# Altium PCB new_controller.PcbDoc
Units mil, origin at the board's own origin, x right, y up, seen from the top; angles counter-clockwise.
Board outline 6000 x 4000 mil, 2 copper layers (Top Layer, Bottom Layer); 61 components, 46 nets, 228 pads, 0 vias.
Unrouted connection lines stored in the file: 145.
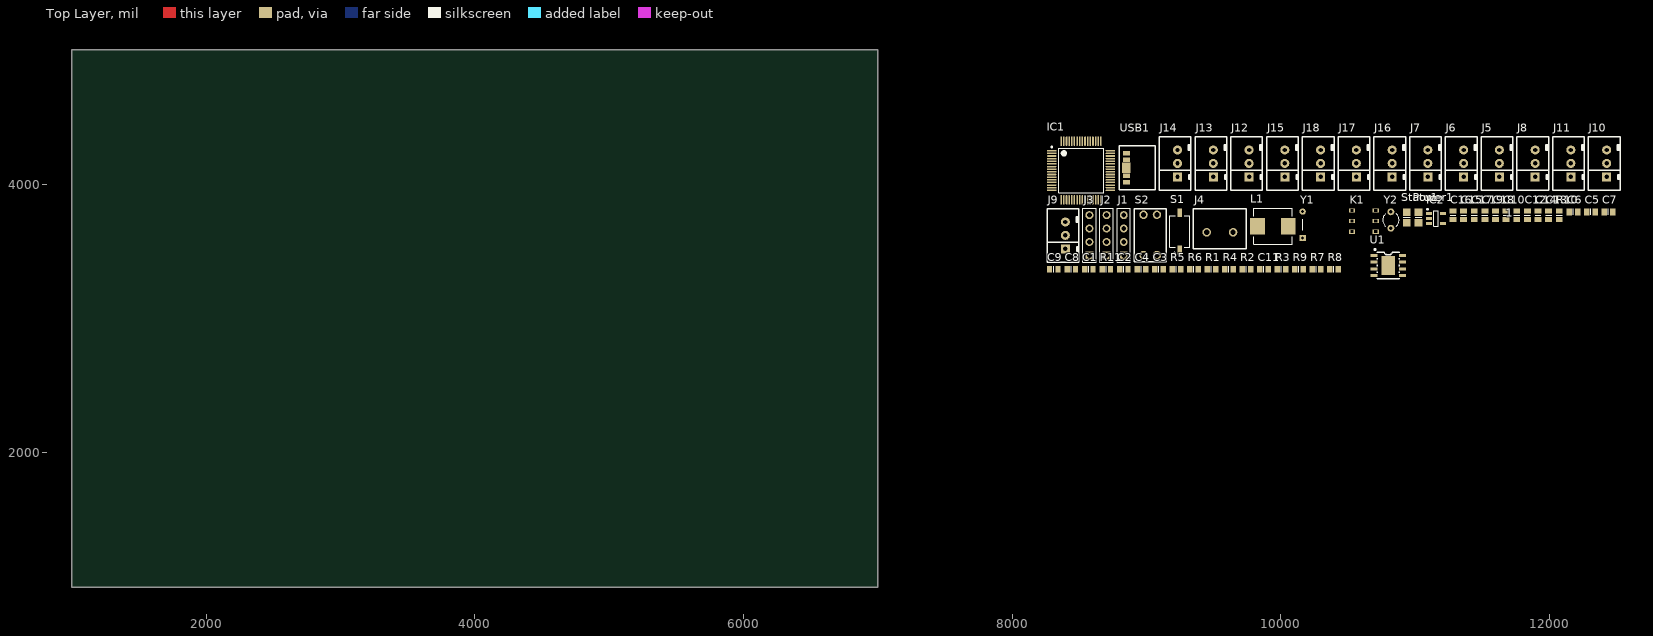
[diagram p0: Top Layer view]
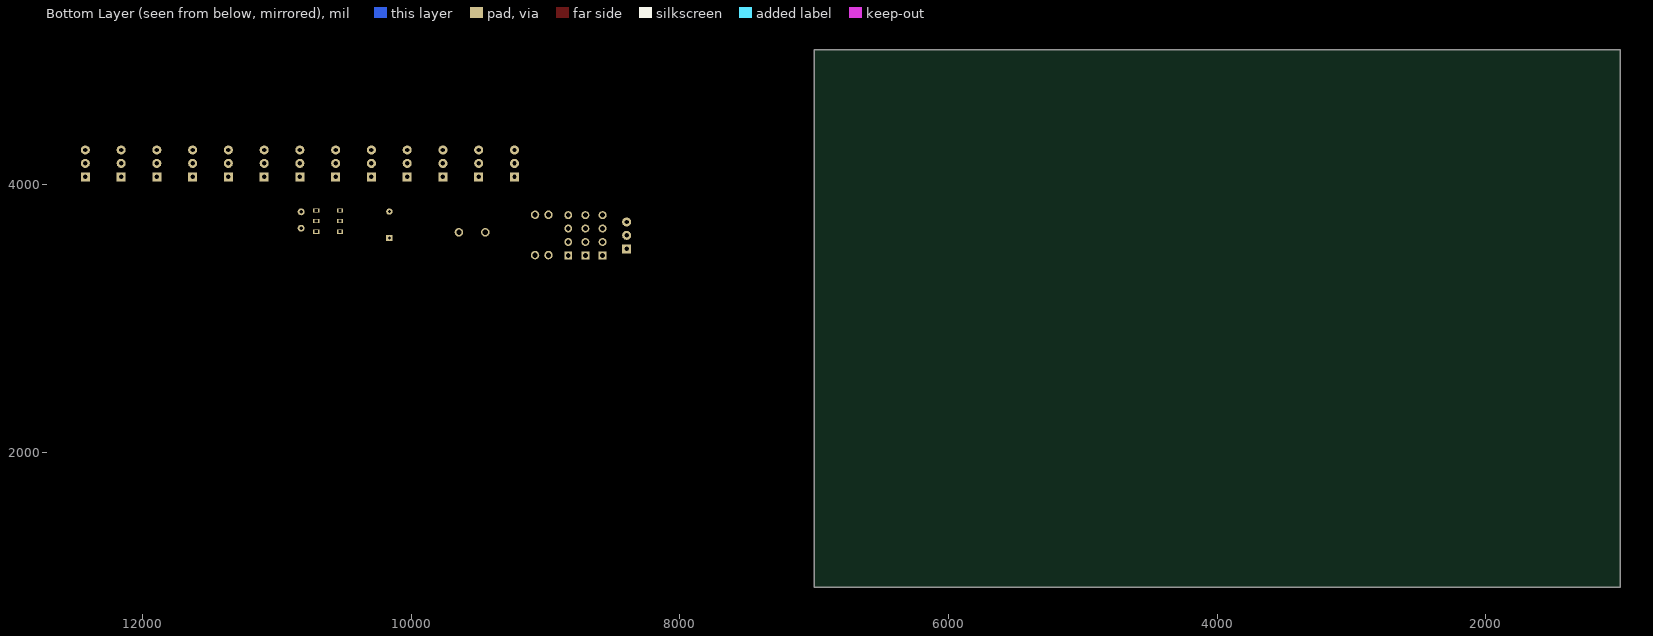
[diagram p1: Bottom Layer view, seen from below]

## Layer stack, top to bottom
Top Solder: solder mask 0.4, Solder Resist, Dk 3.5
Top Layer: signal copper 1.4
Dielectric 1: dielectric 12.6, FR-4, Dk 4.8
Bottom Layer: signal copper 1.4
Bottom Solder: solder mask 0.4, Solder Resist, Dk 3.5

## Board outline
1000,1000 7000,1000 7000,5000 1000,5000

## Design rules (kind name [scope] priority, off if disabled: settings)
Clearance [All] p1: gap=10 ignorepadtopadclearanceinfootprint=FALSE except(0: Arc-Hole Track-Hole SMDPad-SMDPad SMDPad-Hole THPad-Hole Via-Hole Fill-Hole Poly-Hole Region-Hole Text-Hole)
PolygonConnect [All] p1: connectstyle=Relief reliefconductorwidth=10 reliefentries=4 polygonreliefangle="90 Angle" airgapwidth=10
RoutingVias [All] p1: holewidth=28 width=50 viastyle="Through Hole" minholewidth=28 minwidth=50 maxholewidth=28 maxwidth=50
SolderMaskExpansion [All] p1: expansion=4
Width [All] p1: maxlimit=10 minlimit=10 preferedwidth=10
30 further rules are at their usual default settings.

## Components (designator, comment, footprint, x,y, rotation, side; value= is the part's Value field where it differs from the comment)
1 "LED" 6-0805_L 11756.7,3768.95 r90 top
C1 "0.1uf" 6-0805_L 8570.91,3366.66 r0 top
C2 "1uf" 6-0805_L 8831.63,3366.66 r0 top
C3 "22pF" 6-0805_L 9092.35,3366.66 r0 top
C4 "22pF" 6-0805_L 8961.99,3366.66 r0 top
C5 "0.1uf" 6-0805_L 12308.56,3794.54 r0 top
C6 "22pF" 6-0805_L 12178.2,3794.54 r0 top
C7 "22pF" 6-0805_L 12438.92,3794.54 r0 top
C8 "10uf" 6-0805_L 8440.54,3366.66 r0 top
C9 "0.1uf" 6-0805_L 8310.18,3366.66 r0 top
C10 "10uf" 6-0805_L 11677.52,3768.95 r90 top
C11 "22uf" 6-0805_L 9874.53,3366.66 r0 top
C12 "22uf" 6-0805_L 11835.88,3768.95 r90 top
C13 "22uf" 6-0805_L 11994.24,3768.95 r90 top
C14 "22uf" 6-0805_L 11915.06,3768.95 r90 top
C15 "0.1uf" 6-0805_L 11360.79,3768.95 r90 top
C16 "22uf" 6-0805_L 11281.61,3768.95 r90 top
C17 "470pF" 6-0805_L 11439.98,3768.95 r90 top
C18 "22uf" 6-0805_L 11598.34,3768.95 r90 top
C19 "2.2uF" 6-0805_L 11519.16,3768.95 r90 top
IC1 "STM32F103RBT6" LQFP64_N 8512.94,4102.06 r0 top
IC2 "MIC5205-3.3" SOT-23-5 11155.19,3745.39 r0 top
J1 "CON4" HDR1X4 8830.91,3470.19 r90 top
J2 "蓝牙" HDR1X4 8703.03,3470.19 r90 top
J3 "MPU6050" HDR1X4 8575.16,3470.19 r90 top
J4 "BAT" 接线座2P 9546.46,3641.96 r0 top
J5 "CON3" XH2.54-3P 11627.25,4055 r90 top
J6 "CON3" XH2.54-3P 11361.03,4055 r90 top
J7 "CON3" XH2.54-3P 11094.81,4055 r90 top
J8 "CON3" XH2.54-3P 11893.47,4055 r90 top
J9 "CON3" XH2.54-3P 8396.22,3519.13 r90 top
J10 "CON3" XH2.54-3P 12425.91,4055 r90 top
J11 "CON3" XH2.54-3P 12159.69,4055 r90 top
J12 "CON3" XH2.54-3P 9763.71,4055 r90 top
J13 "CON3" XH2.54-3P 9497.49,4055 r90 top
J14 "CON3" XH2.54-3P 9231.27,4055 r90 top
J15 "CON3" XH2.54-3P 10029.93,4055 r90 top
J16 "CON3" XH2.54-3P 10828.59,4055 r90 top
J17 "CON3" XH2.54-3P 10562.37,4055 r90 top
J18 "CON3" XH2.54-3P 10296.15,4055 r90 top
K1 "BUTTON" switch 10529.53,3804.38 r0 top
L1 "1UH" 0630电感 9941.6,3686.33 r0 top
Power1 "LED_Red" 6-0805_M 11024.83,3753.2 r90 top
R1 "10M" 6-0805_L 9483.44,3366.66 r0 top
R2 "2R" 6-0805_L 9744.16,3366.66 r0 top
R3 "10K" 6-0805_L 10004.89,3366.66 r0 top
R4 "10K" 6-0805_L 9613.8,3366.66 r0 top
R5 "1K" 6-0805_L 9222.72,3366.66 r0 top
R6 "10K" 6-0805_L 9353.08,3366.66 r0 top
R7 "0.5R" 6-0805_L 10265.61,3366.66 r0 top
R8 "1K" 6-0805_L 10395.97,3366.66 r0 top
R9 "1K" 6-0805_L 10135.25,3366.66 r0 top
R10 "10K" 6-0805_L 12073.42,3768.95 r90 top
R11 "10K" 6-0805_L 8701.27,3366.66 r0 top
S1 "KEY_2P" button 9247.83,3648.87 r90 top
S2 "DIP2" DIP2 9027.95,3622.28 r0 top
Statu1 "LED_Blue" 6-0805_M 10937.77,3753.2 r90 top
U1 "IP5306" ESOP8 10662.88,3469.61 r0 top
USB1 "USB" Type-C 8850.87,4122.93 r90 top
Y1 "XTAL_8M" xtal 10162.51,3599.65 r90 top
Y2 "XTAL_32.768K" R38 10819.28,3733.51 r0 top

## Footprints (in the part's own frame and the unit in brackets; to place one, negate y for a bottom-side part, rotate by r counter-clockwise, add the part's x,y. Pads: shape width x height; smd on the part's side, far side on the other; paste and mask are expansions set on the pad)
6-0805_L [mm] "Chip Resistor, Body 2.0x1.2mm, IPC High Density"
  rect 1x1.3 smd: 1(-0.8,0) 2(0.8,0)
  silkscreen extent 0,-0.55 0,0.55, body extent -1.07,-0.7 1.07,0.7, height 0.7
6-0805_M [mm] "Chip Resistor, Body 2.0x1.2mm, IPC Low Density"
  rect 1.4x1.5 smd: 1(-1,0) 2(1,0)
  silkscreen extent 0,-0.65 0,0.65, body extent -1.07,-0.7 1.07,0.7, height 0.7
0630电感 [mm] "Precision Wire Wound Inductor, 2-Leads, Body 7.30x6.60mm, IPC Medium Density"
  rect 2.75x3.1 smd: 1(-2.925,0) 2(2.925,0)
  silkscreen extent -3.65,-3.4 3.65,3.4, body extent -3.65,-3.4 3.65,3.4, height 3
button [mm] "SODFL, 2-Leads, Body 3.70x8.00mm, IPC Medium Density"
  rect 1.65x0.85 smd: 1(-3.525,0) 2(3.525,0)
  silkscreen extent -4.22,-1.85 3,1.85, body extent -3,-1.85 3,1.85, height 2.5
DIP2 [mm]
  round 1.6 hole 1: ""(-1.27,-3.81) ""(-1.27,3.81) ""(1.27,-3.81) ""(1.27,3.81)
  silkscreen extent -3,-5.1 3,5
ESOP8 [mm]
  rect 1.3x0.6 smd: 1(0.783,0.01) 2(0.783,-1.26) 3(0.783,-2.53) 4(0.783,-3.8) 5(6.183,-3.8) 6(6.183,-2.53) 7(6.183,-1.26) 8(6.183,0.01)
  rect 2.5x3.5 smd: 9(3.483,-1.895)
  silkscreen extent 0.81,-4.44 5.53,1.3
HDR1X4 [mm] "Connector; Header; 4 Position"
  rect 1.5x1.5 hole 0.9: 1(0,0)
  round 1.5 hole 0.9: 2(2.54,0) 3(5.08,0) 4(7.62,0)
  silkscreen extent -1.27,-1.27 8.89,1.27, body extent -1.27,-1.27 8.89,1.27, height 8.38
LQFP64_N [mm] "Thin QFP, 64-Leads, Body 10x10mm, Pitch 0.5mm, IPC Medium Density"
  oval 1.8x0.3 smd: 1(-5.55,3.75) 2(-5.55,3.25) 3(-5.55,2.75) 4(-5.55,2.25) 5(-5.55,1.75) 6(-5.55,1.25) 7(-5.55,0.75) 8(-5.55,0.25) 9(-5.55,-0.25) 10(-5.55,-0.75) 11(-5.55,-1.25) 12(-5.55,-1.75) 13(-5.55,-2.25) 14(-5.55,-2.75) 15(-5.55,-3.25) 16(-5.55,-3.75) 33(5.55,-3.75) 34(5.55,-3.25) 35(5.55,-2.75) 36(5.55,-2.25) 37(5.55,-1.75) 38(5.55,-1.25) 39(5.55,-0.75) 40(5.55,-0.25) 41(5.55,0.25) 42(5.55,0.75) 43(5.55,1.25) 44(5.55,1.75) 45(5.55,2.25) 46(5.55,2.75) 47(5.55,3.25) 48(5.55,3.75)
  oval 0.3x1.8 smd: 17(-3.75,-5.55) 18(-3.25,-5.55) 19(-2.75,-5.55) 20(-2.25,-5.55) 21(-1.75,-5.55) 22(-1.25,-5.55) 23(-0.75,-5.55) 24(-0.25,-5.55) 25(0.25,-5.55) 26(0.75,-5.55) 27(1.25,-5.55) 28(1.75,-5.55) 29(2.25,-5.55) 30(2.75,-5.55) 31(3.25,-5.55) 32(3.75,-5.55) 49(3.75,5.55) 50(3.25,5.55) 51(2.75,5.55) 52(2.25,5.55) 53(1.75,5.55) 54(1.25,5.55) 55(0.75,5.55) 56(0.25,5.55) 57(-0.25,5.55) 58(-0.75,5.55) 59(-1.25,5.55) 60(-1.75,5.55) 61(-2.25,5.55) 62(-2.75,5.55) 63(-3.25,5.55) 64(-3.75,5.55)
  silkscreen extent -5.67,-4.25 4.25,4.57, body extent -5,-5 5,5, height 1.6
R38 [mm] "Crystal, Thru-Hole; 2 Leads; Body 3.1 x 8.2 mm (Dia.xH)"
  round 1.3 hole 0.7: 1(0,1.55) 2(0,-1.55)
  silkscreen extent -1.55,-1.19 1.55,1.17
SOT-23-5 [mm]
  rect 1.1x0.6 smd: 1(-1.3,0.95) 2(-1.3,0) 3(-1.3,-0.95) 4(1.3,-0.95) 5(1.3,0.95)
  silkscreen extent -1.72,-1.45 0.43,1.87, body extent -1.37,-1.45 1.43,1.45, height 1.45
switch [mm]
  rect 1.2x0.8 hole 0.5 square: 1(0,0) 2(0,-2) 3(0,-4) 4(4.5,-4) 5(4.5,-2) 6(4.5,0)
Type-C [mm] "贴片母头"
  rect 0.8x1.4 smd: 1(-2.75,0) 1(2.75,0) 2(-1.52,0) 2(1.52,0) ""(-0.5,0) ""(0.5,0)
  rect 1.95x1.2 smd: ""(0,0) ""(0,0)
  rect 1.95x1.6 smd: ""(0,0) ""(0,0)
  silkscreen extent -4.17,-5.44 4.17,1.4
XH2.54-3P [mm]
  rect 1.7x1.7 hole 0.83: 1(0,0)
  round 1.7 hole 0.83: 2(2.54,0) 3(5.08,0)
  silkscreen extent -2.54,-2.54 7.62,3.46, body extent -2.41,-2.35 7.49,3.4, height 7
xtal [mm]
  rect 1.2x1.2 hole 0.6: 1(0,0)
  round 1.2 hole 0.6: 2(5,0)
  silkscreen extent 1.43,0 3.57,0
接线座2P [mm]
  round 1.6 hole 1: 1(-2.5,0) 2(2.5,0)
  silkscreen extent -5,-3.1 5,4.5

## Part data
C1 C2 C3 C4 C5 C6 C7 C9 C15 C17 C19: library part "Cap Semi", "Capacitor (Semiconductor SIM Model)"
C8 C10 C11 C12 C13 C14 C16 C18: library part CAP, "电容"
IC1: "STM32 ARM-based 32-bit MCU with 128 Kbytes Flash, 64-pin LQFP, Industrial Temperature"
IC2: "稳压"
J1 J5 J6 J7 J8 J9 J10 J11 J12 J13 J14 J15 J16 J17 J18: "连接器"
J2 J3: library part CON4, "Connector"
J4: library part CON2, "连接器"
K1: "自锁按键"
L1: library part Inductor, "电感"
Power1 Statu1: library part LED, "LED"
R1 R3 R4 R5 R6 R8 R10 R11: library part Res3, "Resistor"
R2 R7 R9: library part RES, "电阻"
S1: "轻触按键2P"
S2: library part 拨码开关2DIP
USB1: library part CON2, "Conjunctor"
Y1 Y2: library part XTAL, "Crystal Oscillator"

## Nets (pads, with @x,y where several pads share a name; then routed paths per layer and width w, separated by ;. In a path a pad name is that pad's centre, name@x,y a point inside that pad or via, vN(x,y) a via of type N, cw(c..) or ccw(c..) an arc to the next point about the centre after c; other vN are vias at no path point)
+5: IC2.1 IC2.3 J2.1 J5.1 J6.1 J7.1 J8.1 J9.1 J10.1 J11.1 J12.1 J13.1 J14.1 J15.1 J16.1 J17.1 J18.1 K1.2 K1.5
ADC0: IC1.14 J5.2
ADC1: IC1.15 J6.2
ADC2: IC1.16 J7.2
ADC3: IC1.17 J8.2
ADC4: IC1.20 J9.2
ADC5: IC1.21 J10.2
ADC6: IC1.22 J11.2
ADC7: IC1.23 J12.2
ADC8: IC1.26 J13.2
ADC9: IC1.27 J14.2
ADC10: IC1.8 J15.2
ADC11: IC1.9 J16.2
ADC12: IC1.10 J17.2
ADC13: IC1.11 J18.2
BOOT0: IC1.60 R3.2
BOOT1: IC1.28 R4.1
Function_1: IC1.41
Function_2: IC1.42
GND: 1.2 C1.1 C2.1 C3.1 C4.1 C5.1 C6.1 C7.1 C8.2 C9.1 C10.2 C11.2 C12.2 C13.2 C14.2 C15.1 C16.2 C17.1 C18.2 C19.1 IC1.12 IC1.18 IC1.31 IC1.47 IC1.63 IC2.2 J1.1 J2.2 J3.3 J4.2 J5.3 J6.3 J7.3 J8.3 J9.3 J10.3 J11.3 J12.3 J13.3 J14.3 J15.3 J16.3 J17.3 J18.3 R3.1 R4.2 R5.1 S1.2 U1.9 USB1.2
Net1_A: 1.1 U1.2
NetC8_1: C8.1 R2.1
NetC10_1: C10.1 R2.2 U1.1 USB1.1
NetC11_1: C11.1 C12.1 C13.1 C14.1 K1.3 U1.8
NetC16_1: C16.1 R7.2 U1.6
NetC17_2: C17.2 IC2.4
NetC18_1: C18.1 J4.1 L1.2 R7.1 R9.1
NetIC1_46: IC1.46 J1.3
NetIC1_49: IC1.49 J1.2
NetL1_1: L1.1 U1.7
NetPower1_2: Power1.2 R5.2
NetR8_2: R8.2 Statu1.2
NetR9_2: R9.2 U1.3 U1.4
NetR10_1: R10.1
NetR11_1: R11.1
NRST: C15.2 IC1.7 R6.1 S1.1
PB12: IC1.33 R8.1
RXD1: IC1.29 J2.4
SCL: IC1.58 J3.2
SDA: IC1.59 J3.1
TXD1: IC1.30 J2.3
VCC3.3: C1.2 C2.2 C5.2 C9.2 C19.2 IC1.1 IC1.13 IC1.19 IC1.32 IC1.48 IC1.64 IC2.5 J1.4 J3.4 Power1.1 R6.2 R10.2 R11.2 Statu1.1
XTAL_A: C3.2 IC1.5 R1.1 Y1.1
XTAL_B: C6.2 IC1.6 R1.2 Y1.2
XTAL_C: C4.2 IC1.3 Y2.1
XTAL_D: C7.2 IC1.4 Y2.2
pads on no net: IC1.2 IC1.24 IC1.25 IC1.34 IC1.35 IC1.36 IC1.37 IC1.38 IC1.39 IC1.40 IC1.43 IC1.44 IC1.45 IC1.50 IC1.51 IC1.52 IC1.53 IC1.54 IC1.55 IC1.56 IC1.57 IC1.61 IC1.62 K1.1 K1.4 K1.6 S2. U1.5 USB1.

## Text inside footprints (layer, text, board x,y; h text height)
IC2: Mechanical 15 "1" at 11172.9,3738.92 h29.53 r90